# Altium PCB ECE315.PcbDoc (part 2 of 2)
Units mm, origin at the board's own origin, x right, y up, seen from the top; angles counter-clockwise.
Board outline 100.25 x 100.25 mm, 2 copper layers (Top Layer, Bottom Layer); 67 components, 52 nets, 224 pads, 120 vias.
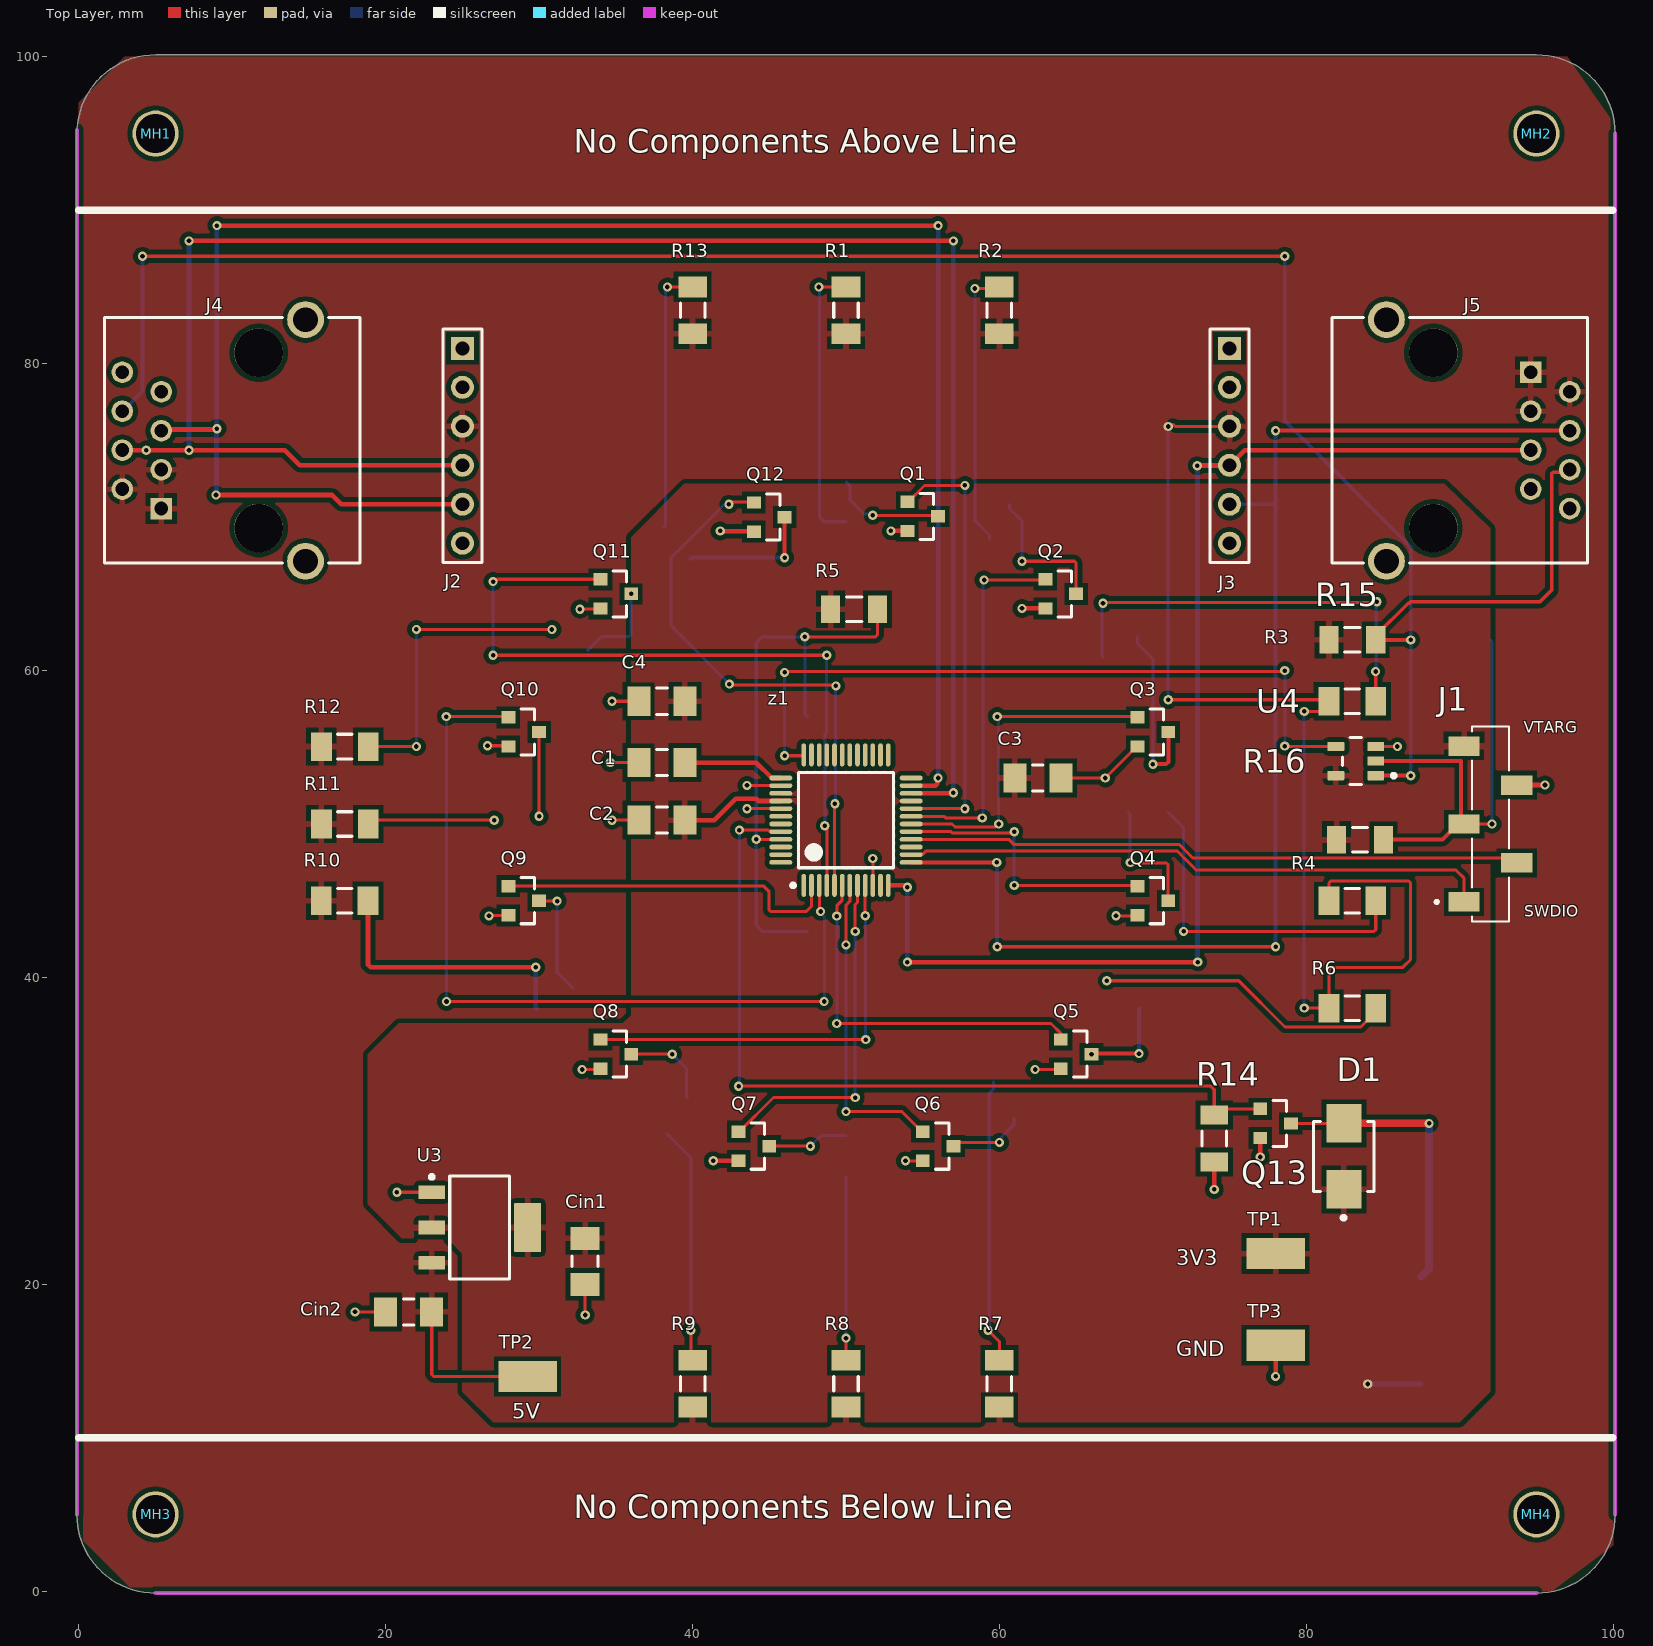
[diagram p0: Top Layer view]

## Silkscreen, mask and mechanical layers (free items; w line width, h text height) (continued)
Top Overlay: (continued)
  text "No Components Below Line" at 32.254,4.762 h1.52
Bottom Overlay:
  circle w2.54: c50,50 r26.747
  text "Sections 001" at 10.578,64.746 h4 r90
  text "PEI YU LIN" at 5.746,62.746 h4 r90
Mechanical 2:
  lines w0.254: 0,5 0,95 ; 2,9 92,9 ; 100,5 100,95

## Dimensions
0.308,4.999 to 100.308,4.999 on Mechanical 1

## Text inside footprints (layer, text, board x,y; h text height)
U1: Bottom Overlay "ECE 315" at 12,2.592 h1.02
z1: Mechanical 10 "Pe Yu Lin" at 57.239,43.9 h1.52 r90